# EAGLE board fabpdi-t90usb_v1 (EAGLE 8.2.2)
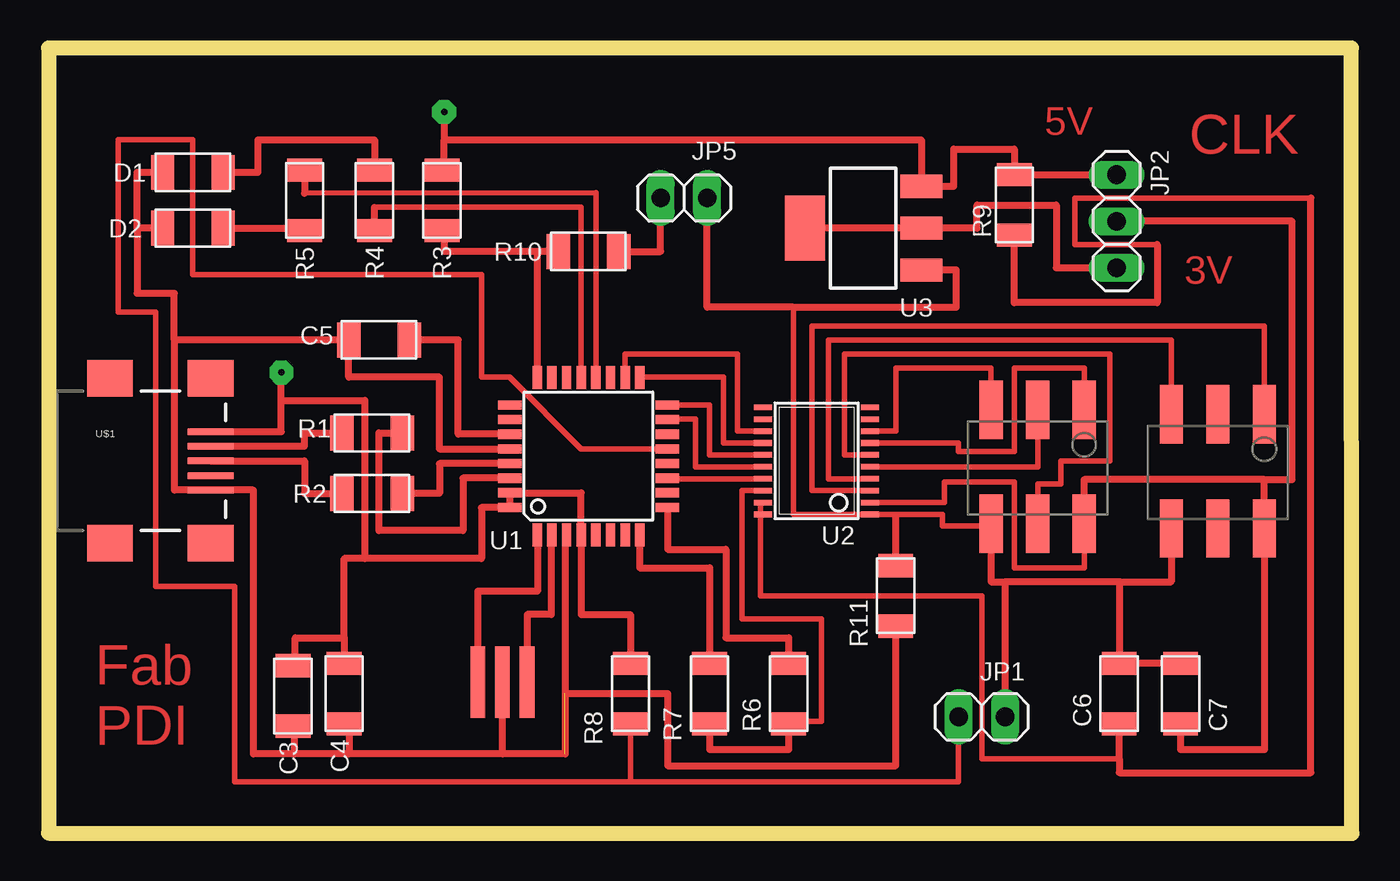
[diagram p0: board, top side]
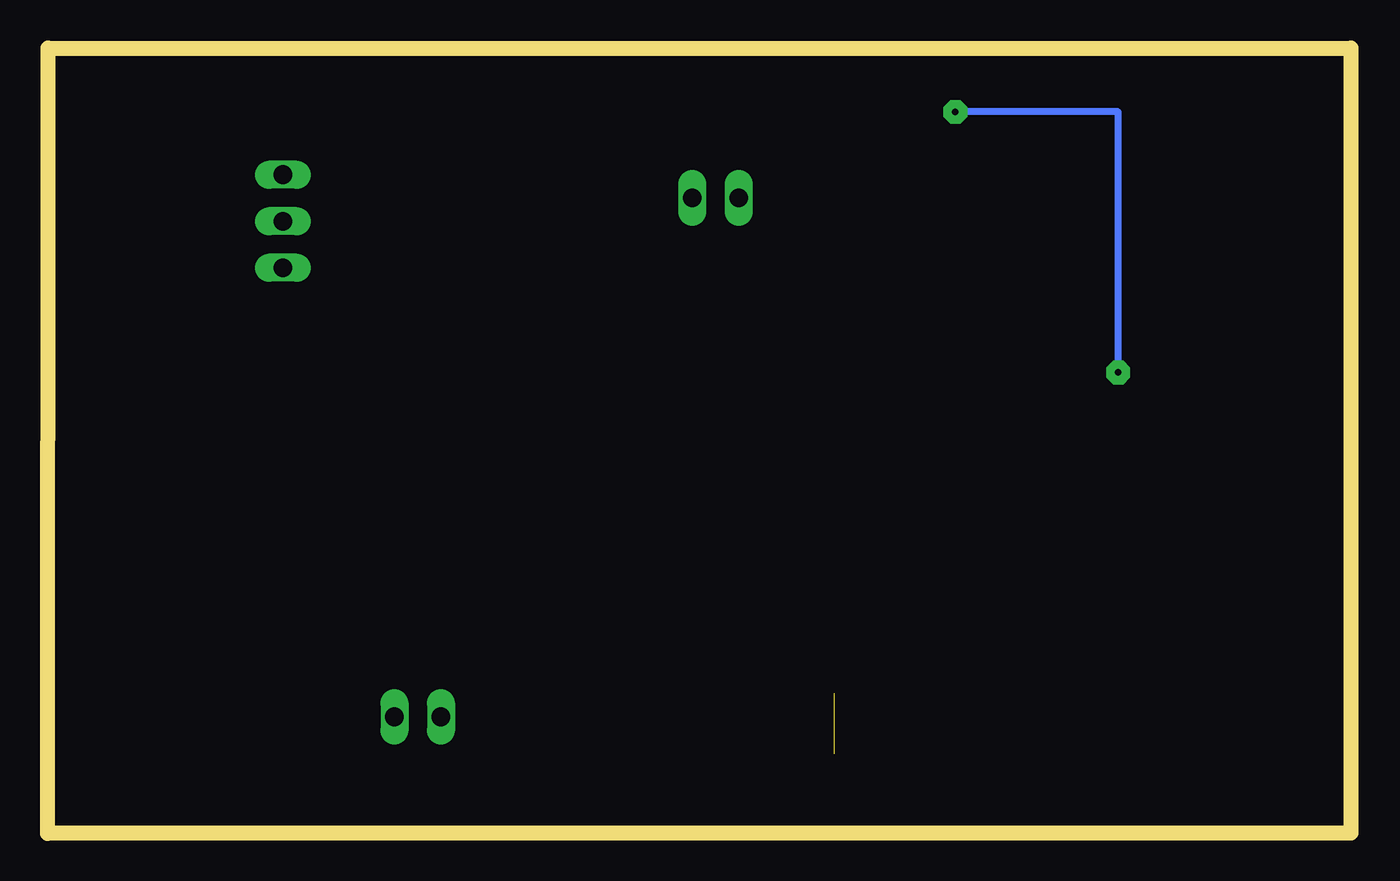
[diagram p1: board, bottom side, seen from below]

Size 71.12 x 42.87 mm. Coordinates in mm from the lower left corner, seen from the top.
Outline: 0,0.02 71.12,0 71.1,42.87 0,42.87 0,0.02
Copper layers (1*16): Top 0.035mm / dielectric 1.5mm / Bottom 0.035mm
Design rules "default *": minimum track width 6mil, minimum drill 0.35mm, track to track 10mil, track to pad 10mil, pad to pad 10mil, via to via 10mil, smd to smd 8mil, copper to edge 40mil, drill to drill 6mil, minimum pad ring 10mil, minimum via ring 8mil, stop-mask expansion 4mil, vias tented up to drill 0mil, thermal gap 10mil

## Footprints (pad centres in the part's own frame; a part is rotated, then mirrored left to right if it is on the bottom)
C1206FAB = smd 1.27 x 1.905: 1 -1.651,0; 2 1.651,0
LED1206FAB = smd 1.27 x 1.905: 1 -1.651,0; 2 1.651,0
1X02 = drill 1.016 long: 1 -1.27,0; 2 1.27,0
1X03 = drill 1.016 long: 1 -2.54,0; 2 0,0; 3 2.54,0
2X03SMD-FAB = smd 3.175 x 1.27: 1 -2.794,2.54; 2 3.429,2.54; 3 -2.794,0; 4 3.429,0; 5 -2.794,-2.54; 6 3.429,-2.54
R1206FAB = smd 1.27 x 1.905: 1 -1.651,0; 2 1.651,0
TQFP32-08 = smd 1.27 x 0.508: 1 -4.293,2.8; 2 -4.293,2; 3 -4.293,1.2; 4 -4.293,0.4; 5 -4.293,-0.4; 6 -4.293,-1.2; 7 -4.293,-2; 8 -4.293,-2.8; 17 4.293,-2.8; 18 4.293,-2; 19 4.293,-1.2; 20 4.293,-0.4; 21 4.293,0.4; 22 4.293,1.2; 23 4.293,2; 24 4.293,2.8 | smd 0.508 x 1.27: 9 -2.8,-4.293; 10 -2,-4.293; 11 -1.2,-4.293; 12 -0.4,-4.293; 13 0.4,-4.293; 14 1.2,-4.293; 15 2,-4.293; 16 2.8,-4.293; 25 2.8,4.293; 26 2,4.293; 27 1.2,4.293; 28 0.4,4.293; 29 -0.4,4.293; 30 -1.2,4.293; 31 -2,4.293; 32 -2.8,4.293
TSSOP20 = smd 0.305 x 0.991: 1 -2.925,-2.918; 2 -2.275,-2.918; 3 -1.625,-2.918; 4 -0.975,-2.918; 5 -0.325,-2.918; 6 0.325,-2.918; 7 0.975,-2.918; 8 1.625,-2.918; 9 2.275,-2.918; 10 2.925,-2.918; 11 2.925,2.918; 12 2.275,2.918; 13 1.625,2.918; 14 0.975,2.918; 15 0.325,2.918; 16 -0.325,2.918; 17 -0.975,2.918; 18 -1.625,2.918; 19 -2.275,2.918; 20 -2.925,2.918
SOT-223 = smd 1.27 x 2.286: 1 -2.286,-3.175; 2 0,-3.175; 3 2.286,-3.175 | smd 3.556 x 2.159: TER 0,3.175
USB_MINI = smd 2.5 x 0.35: D+ 3.77,0; D- 3.77,0.8; GND 3.77,-1.6; ID 3.77,-0.8; VBUS 3.77,1.6 | smd 2.5 x 2: SHIELD@1 -1.73,-4.5; SHIELD@2 -1.73,4.5; SHIELD@3 3.77,4.5; SHIELD@4 3.77,-4.5
EFOBM = smd 0.8 x 3.9: 1 -1.35,0; 2 0,0; 3 1.35,0

## Placement (x,y rotation side)
C3  0.1u  [C1206FAB]  13.34,7.51 90 top
C4  10u  [C1206FAB]  16.13,7.64 90 top
C5  1u  [C1206FAB]  18.03,26.94 0 top
C6  0.1u  [C1206FAB]  58.42,7.64 270 top
C7  0.1u  [C1206FAB]  61.77,7.64 270 top
D1  red  [LED1206FAB]  7.87,36.09 180 top
D2  green  [LED1206FAB]  7.87,33.04 180 top
JP1  [1X02]  50.93,6.37 180 top
JP2  [1X03]  58.29,33.42 270 top
JP3  ISP  [2X03SMD-FAB]  53.98,20.34 270 top
JP4  PDI  [2X03SMD-FAB]  63.8,20.09 270 top
JP5  [1X02]  34.67,34.69 0 top
R1  49  [R1206FAB]  17.65,21.86 0 top
R2  49  [R1206FAB]  17.65,18.56 0 top
R3  10k  [R1206FAB]  21.46,34.56 90 top
R4  1k  [R1206FAB]  17.78,34.56 90 top
R5  1k  [R1206FAB]  13.97,34.56 270 top
R6  49  [R1206FAB]  40.39,7.64 270 top
R7  49  [R1206FAB]  36.07,7.64 270 top
R8  1k  [R1206FAB]  31.75,7.64 90 top
R9  100k  [R1206FAB]  52.7,34.31 90 top
R10  0  [R1206FAB]  29.46,31.77 180 top
R11  0  [R1206FAB]  46.23,12.97 90 top
U1  AT90USB162A  [TQFP32-08]  29.46,20.59 90 top
U2  GTL2003PW  [TSSOP20]  41.91,20.34 90 top
U3  AMS1117-3.3  [SOT-223]  44.45,33.04 90 top
U$1  USB_MINI  [USB_MINI]  5.08,20.34 0 top
X1  16MHz  [EFOBM]  24.77,8.28 0 top

## Library data of the parts
C3-C7 D1 D2 JP3 JP4 R1-R11 U$1 X1 = 00fab
JP1 JP2 JP5 = pinhead
U1 = adafruit
U2 = gtl2003
U3 = Seeed-IC; MPN: CJT1117-3.3

## Nets
GND: C3.1 C4.1 C5.1 D1.2 D2.2 U1.3 U1.28 U$1.GND X1.2
N$1: R4.1 U1.21
N$2: C5.2 U1.27
N$3: U1.1 X1.1
N$4: U1.2 X1.3
N$5: R2.1 U$1.D+
N$6: R2.2 U1.29
N$7: R1.1 U$1.D-
N$8: R1.2 U1.30
N$9: R3.1 R10.2 U1.24
N$10: R5.1 U1.20
N$11: D1.1 R4.2
N$12: D2.1 R5.2
N$13: U1.11 U2.17
N$14: R6.1 U1.9
N$15: R7.1 U1.8
N$16: JP1.2 R8.1 U1.13
N$17: R6.2 R7.2 U2.18
N$18: U1.15 U2.16
N$19: U1.16 U2.15
N$20: U1.17 U2.14
N$21: U1.18 U2.13
N$22: C6.2 R9.1 U2.20
N$23: JP3.1 U2.7
N$24: JP2.3 U3.2 U3.TER
N$25: JP3.3 U2.5
N$26: JP3.4 U2.6
N$27: JP3.5 U2.8
N$28: JP4.5 U2.4
N$29: JP4.1 U2.3
N$31: JP5.1 R10.1
S$1: C6.1 C7.1 JP1.1 JP3.6 JP4.6 JP5.2 U2.1 U3.1
V+: C7.2 JP2.2 JP3.2 JP4.2 U2.2
VCC: C3.2 C4.2 JP2.1 R3.2 R8.2 R9.2 U1.4 U1.31 U1.32 U3.3 U$1.VBUS

## Tracks (layer width: path | path; a pad name or v marks a point on that pad's centre or on a via)
GND  (1 unrouted)
  Top 0.381: 13.41,4.34 11.18,4.34 11.18,18.74 U$1.GND 6.86,18.74 6.86,26.94 | 16.39,4.34 13.41,4.34 | C3.1 13.41,5.86 13.41,4.34 | C4.1 16.39,5.99 16.39,4.34 | 6.86,26.94 6.86,29.48 4.83,29.48 4.83,33.04 | 4.83,33.04 4.83,36.09 D1.2 | D2.2 4.83,33.04 | 6.86,26.94 C5.1 16.38,24.91 21.34,24.91 21.34,20.99 U1.28 | 24.77,4.34 16.39,4.34 | X1.2 24.77,9.54 24.77,4.34 | U1.3 28.19,16.3 28.19,4.34 24.77,4.34 | 28.19,7.64 33.78,7.64 33.78,3.7 46.23,3.7 46.23,11.45
N$1
  Top 0.305: 17.78,34.18 29.06,34.18 U1.21
  Top 0.381: R4.1 17.78,34.18
N$2
  Top 0.381: U1.27 22.35,21.79 22.35,26.94 C5.2
N$3
  Top 0.381: U1.1 26.67,13.23 23.41,13.23 X1.1
N$4
  Top 0.381: U1.2 27.43,16.3 27.43,11.96 26.11,11.96 X1.3
N$5
  Top 0.381: U$1.D+ 13.97,20.34 13.97,18.56 R2.1
N$6
  Top 0.381: U1.29 21.34,20.19 21.34,18.56 R2.2
N$7
  Top 0.381: U$1.D- 13.97,21.14 13.97,21.86 R1.1
N$8
  Top 0.381: U1.30 22.61,19.39 22.61,16.53 18.03,16.53 18.03,21.86 R1.2
N$9
  Top 0.381: R3.1 21.59,32.91 21.59,31.77 26.68,31.77 | U1.24 26.68,24.89 26.68,31.77 | R10.2 26.68,31.77
N$10
  Top 0.305: 13.97,34.95 29.87,34.97 U1.20
  Top 0.381: R5.1 13.97,34.95
N$11
  Top 0.381: D1.1 11.43,36.09 11.43,37.87 17.78,37.87 R4.2
N$12
  Top 0.381: D2.1 13.97,33.04 R5.2
N$13
  Top 0.305: U2.17 33.76,19.36 U1.11
N$14
  Top 0.381: U1.9 33.78,17.79 33.78,15.51 36.96,15.51 36.96,10.69 40.39,10.69 R6.1
N$15
  Top 0.381: U1.8 32.26,14.5 36.07,14.5 R7.1
N$16
  Top 0.305: U1.13 29.06,20.99 25.15,24.91 23.62,24.91 23.62,30.5 7.87,30.5 7.87,37.87 3.81,37.87 3.81,28.47 5.84,28.47 5.84,13.48 10.16,13.48 10.16,2.81 31.77,2.81 | R8.1 31.77,5.99 31.77,2.81 | JP1.2 49.66,2.81 31.77,2.81
N$17
  Top 0.305: U2.18 37.85,18.71 37.85,11.7 42.16,11.7 42.16,6.12 40.39,6.12 40.39,5.94
  Top 0.381: R7.2 36.07,4.59 40.39,4.59 40.39,5.94 R6.2
N$18
  Top 0.305: U2.16 35.31,20.02 35.31,22.63 33.76,22.63 U1.15
N$19
  Top 0.305: U2.15 36.07,20.66 36.07,23.39 U1.16
N$20
  Top 0.305: U2.14 36.83,21.32 36.83,24.91 32.26,24.91 U1.17
N$21
  Top 0.305: U2.13 37.59,21.96 37.59,26.18 31.46,26.18 U1.18
N$22
  Top 0.305: U2.20 38.86,17.41 | 38.86,17.41 38.86,17.29 38.86,12.97 50.93,12.97 50.93,4.08 58.42,4.08 | 68.89,34.69 56.01,34.69 56.01,32.15 60.5,32.15 | 38.86,17.41 38.86,18.05
  Top 0.381: C6.2 58.42,4.08 58.42,3.32 68.89,3.32 68.89,34.69 | R9.1 52.7,28.98 60.5,28.98 60.5,32.15
N$23
  Top 0.305: U2.7 49.66,21.32 49.66,20.85 52.7,20.85 52.7,25.42 56.52,25.42 JP3.1
N$24
  Top 0.381: JP2.3 54.99,30.88 54.99,34.31 50.67,34.31 50.67,33.04 U3.2 U3.TER
N$25
  Top 0.305: U2.5 53.98,20.02 JP3.3
N$26
  Top 0.305: U2.6 43.43,20.66 43.43,26.18 57.91,26.18 57.91,20.34 55.24,20.34 55.24,19.07 53.98,19.07 JP3.4
N$27
  Top 0.305: U2.8 46.23,21.96 46.23,25.42 51.44,25.42 JP3.5
N$28
  Top 0.305: U2.4 42.55,19.36 42.55,26.94 61.27,26.94 JP4.5
N$29
  Top 0.305: U2.3 41.66,18.71 41.66,27.71 66.34,27.71 JP4.1
N$30
  Top 0.102: 0,0.02 71.12,0.02 71.07,42.9 -0.05,42.9 0,0.02
N$31
  Top 0.381: R10.1 33.4,31.77 JP5.1
S$1
  Top 0.305: 51.44,16.82 51.44,16.78 48.77,16.78 48.77,17.41 U2.1 40.64,17.41 40.64,28.72
  Top 0.381: C6.1 | C7.1 C6.1 | C6.1 58.47,9.29 58.47,13.74 | JP4.6 61.27,13.74 58.47,13.74 | 52.2,13.74 JP1.1 | 58.47,13.74 52.2,13.74 | 52.2,13.74 51.44,13.74 51.44,16.82 JP3.6 | U3.1 49.53,30.75 49.53,28.72 40.64,28.72 35.94,28.72 JP5.2
S$2
  Top 0.381: 46.23,14.5 46.23,17.29
V+
  Top 0.305: U2.2 48.9,18.07 48.9,19.2 52.7,19.2 52.7,14.5 56.52,14.5 JP3.2
  Top 0.381: C7.2 61.77,4.59 66.34,4.59 JP4.2 66.34,19.32 | 66.34,19.32 56.52,19.32 JP3.2 | JP2.2 67.87,33.42 67.87,19.32 66.34,19.32
VCC  (via drill 0.35 pad 1.3)
  Top 0.305: 47.62,35.58 U3.3
  Top 0.381: U$1.VBUS 12.7,21.94 12.7,23.64 | 12.7,23.64 17.27,23.64 17.27,15.01 | 17.27,15.01 16.13,15.01 16.13,10.69 | 16.13,10.69 C4.2 | C3.2 13.46,9.16 13.46,10.69 16.13,10.69 | 17.27,15.01 23.62,15.01 23.62,17.79 U1.32 U1.31 29.06,18.59 U1.4 29.06,11.96 31.75,11.96 R8.2 | JP2.1 R9.2 52.7,37.36 49.4,37.36 49.4,35.33 U3.3 47.62,37.87 21.59,37.87 | R3.2 21.59,36.22 21.59,37.87 | 21.59,37.87 v21.59,39.39 | 12.7,23.64 v12.7,25.17
  Bottom 0.381: v12.7,25.17 12.7,39.39 v21.59,39.39

## Text on the board
Top: 5V | CLK | 3V | Fab / PDI
tDocu: RST | HWB